# Altium PCB BluetoothGateway_V1.0.0.PcbDoc
Units mil, origin at the board's own origin, x right, y up, seen from the top; angles counter-clockwise.
Board outline 6000 x 4000 mil, 2 copper layers (Top Layer, Bottom Layer); 4 components, 1 nets, 104 pads, 0 vias.
Unrouted connection lines stored in the file: 11.
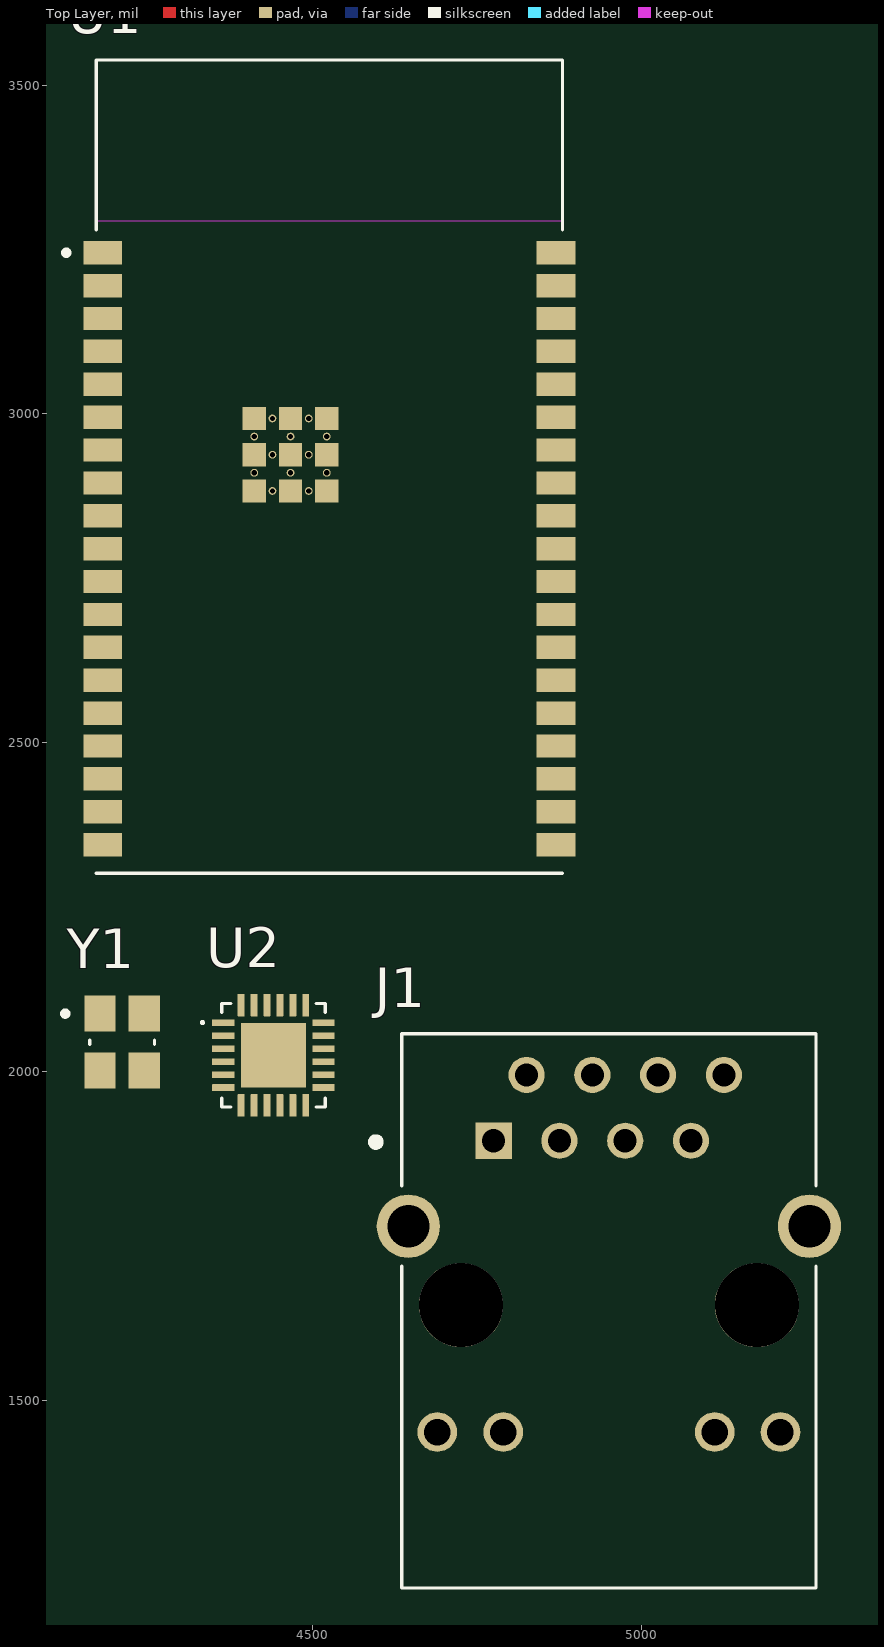
[diagram p0: Top Layer view]
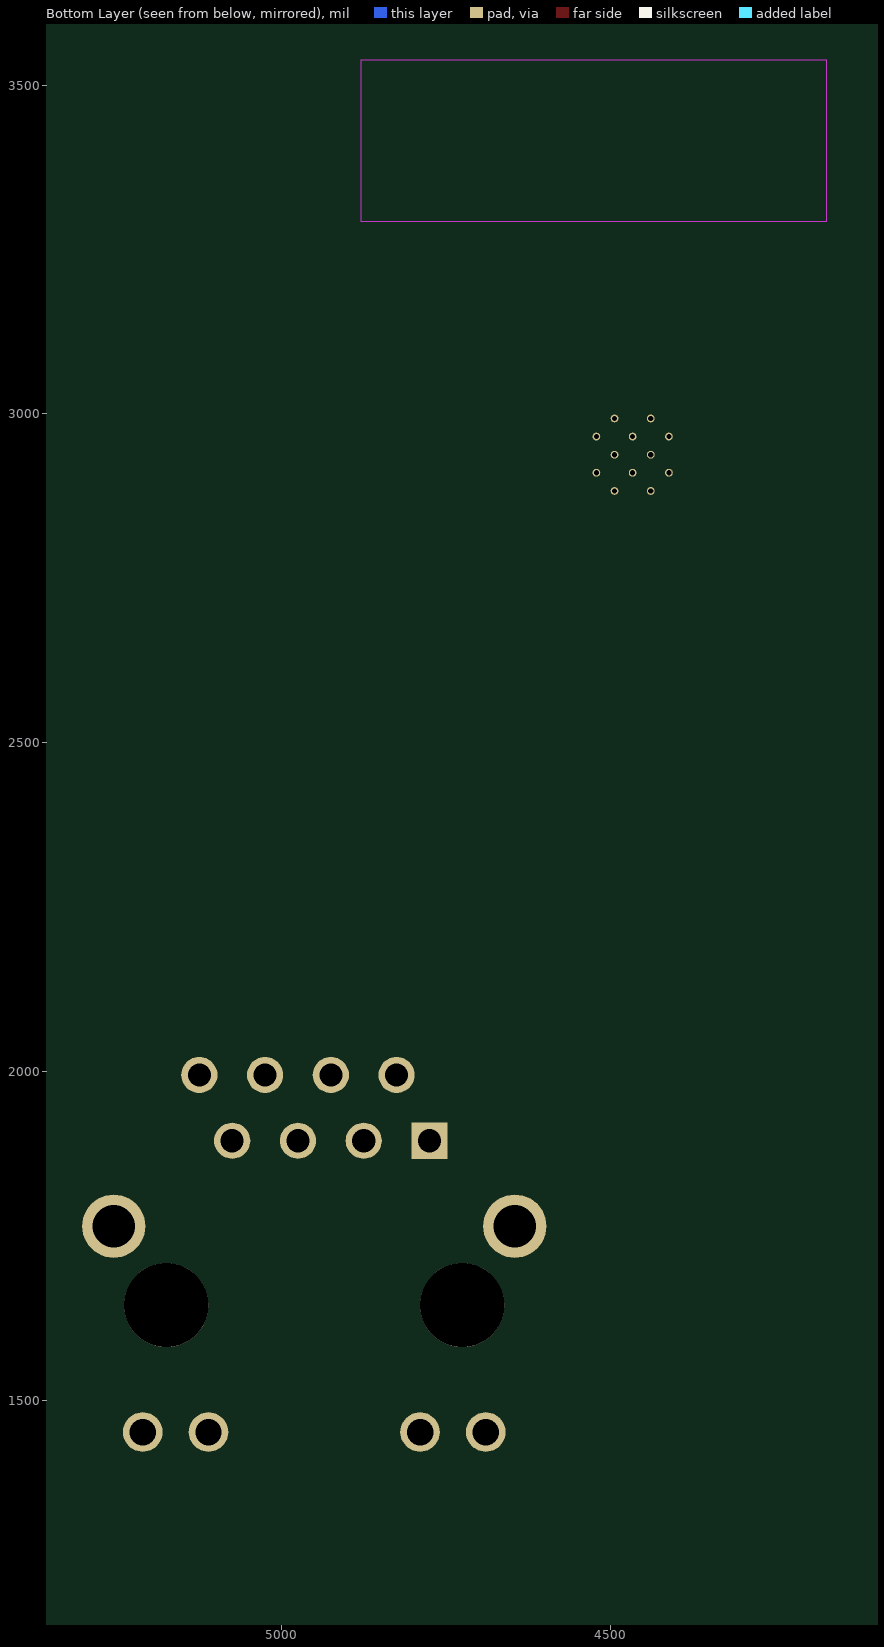
[diagram p1: Bottom Layer view, seen from below]

## Layer stack, top to bottom
Top Solder: solder mask 0.4, Solder Resist, Dk 3.5
Top Layer: signal copper 1.4
Dielectric 1: dielectric 12.6, FR-4, Dk 4.8
Bottom Layer: signal copper 1.4
Bottom Solder: solder mask 0.4, Solder Resist, Dk 3.5

## Board outline
1000,1000 7000,1000 7000,5000 1000,5000

## Design rules (kind name [scope] priority, off if disabled: settings)
Clearance [All] p1: gap=10 ignorepadtopadclearanceinfootprint=FALSE
PolygonConnect [All] p1: connectstyle=Relief reliefconductorwidth=10 reliefentries=4 polygonreliefangle="90 Angle" airgapwidth=10
RoutingVias [All] p1: holewidth=28 width=50 viastyle="Through Hole" minholewidth=28 minwidth=50 maxholewidth=28 maxwidth=50
SolderMaskExpansion [All] p1: expansion=4 istentingtop=FALSE
SupplyNets "Schematic Supply Nets" [InNet('GND')] p1: voltage=0.000
Width [All] p1: maxlimit=10 minlimit=10 preferedwidth=10
30 further rules are at their usual default settings.

## Classes and differential pairs
component class MCU: U1
component class Ethernet: J1 U2 Y1

## Components (designator, comment, footprint, x,y, rotation, side; value= is the part's Value field where it differs from the comment)
J1 "HR911105A" HANRUN_HR911105A 4950,1645 r180 top
U1 "ESP32-WROVER-IE-N4R8" XCVR_ESP32-WROVER-IE-N4R8 4525,2920 r0 top
U2 "LAN8720A-CP-TR" QFN-EP-24 4440,2025 r0 top
Y1 "Crystal_25MHz" Crystal_SMD_3225_4P 4210,2045 r0 top

## Footprints (in the part's own frame and the unit in brackets; to place one, negate y for a bottom-side part, rotate by r counter-clockwise, add the part's x,y. Pads: shape width x height; smd on the part's side, far side on the other; paste and mask are expansions set on the pad)
Crystal_SMD_3225_4P [mm]
  rect 1.2x1.4 smd: 1(-0.85,1.1) 2(-0.85,-1.1) 3(0.85,-1.1) 4(0.85,1.1)
  silkscreen extent -2.3,-0.08 1.25,1.2, body extent -1.25,-1.6 1.25,1.6, height 0.8
HANRUN_HR911105A [mm]
  rect 1.398x1.398 / inner round 1.398 / far side rect 1.398x1.398 hole 0.89: 1(4.45,-6.35)
  round 1.398 hole 0.89: 2(3.18,-8.89) 3(1.91,-6.35) 4(0.64,-8.89) 5(-0.63,-6.35) 6(-1.9,-8.89) 7(-3.17,-6.35) 8(-4.44,-8.89)
  round 1.53 hole 1.02: 9(6.625,4.9) 10(4.085,4.9) 11(-4.085,4.9) 12(-6.625,4.9)
  round 2.445 hole 1.63: 15(7.745,-3.05) 16(-7.745,-3.05)
  round 3.25 hole 3.25 unplated: ""(-5.715,0) ""(5.715,0)
  silkscreen extent -8,-10.48 9.15,10.92, body extent -8.02,-10.4 8.02,10.9, height 13.5
QFN-EP-24 [mm]
  rrect7% 0.86x0.26 smd: 1(-1.935,1.25) 2(-1.935,0.75) 3(-1.935,0.25) 4(-1.935,-0.25) 5(-1.935,-0.75) 6(-1.935,-1.25) 13(1.935,-1.25) 14(1.935,-0.75) 15(1.935,-0.25) 16(1.935,0.25) 17(1.935,0.75) 18(1.935,1.25)
  rrect7% 0.26x0.86 smd: 7(-1.25,-1.935) 8(-0.75,-1.935) 9(-0.25,-1.935) 10(0.25,-1.935) 11(0.75,-1.935) 12(1.25,-1.935) 19(1.25,1.935) 20(0.75,1.935) 21(0.25,1.935) 22(-0.25,1.935) 23(-0.75,1.935) 24(-1.25,1.935)
  rect 2.5x2.5 smd paste-2: 25(0,0)
  silkscreen extent -2.79,-2 2,2, body extent -2,-2 2,2, height 0.95
XCVR_ESP32-WROVER-IE-N4R8 [mm]
  rect 1.5x0.9 smd: 1(-8.75,8.26) 2(-8.75,6.99) 3(-8.75,5.72) 4(-8.75,4.45) 5(-8.75,3.18) 6(-8.75,1.91) 7(-8.75,0.64) 8(-8.75,-0.63) 9(-8.75,-1.9) 10(-8.75,-3.17) 11(-8.75,-4.44) 12(-8.75,-5.71) 13(-8.75,-6.98) 14(-8.75,-8.25) 15(-8.75,-9.52) 16(-8.75,-10.79) 17(-8.75,-12.06) 18(-8.75,-13.33) 19(-8.75,-14.6) 20(8.75,-14.6) 21(8.75,-13.33) 22(8.75,-12.06) 23(8.75,-10.79) 24(8.75,-9.52) 25(8.75,-8.25) 26(8.75,-6.98) 27(8.75,-5.71) 28(8.75,-4.44) 29(8.75,-3.17) 30(8.75,-1.9) 31(8.75,-0.63) 32(8.75,0.64) 33(8.75,1.91) 34(8.75,3.18) 35(8.75,4.45) 36(8.75,5.72) 37(8.75,6.99) 38(8.75,8.26)
  rect 0.9x0.9 smd: 39_1(-2.9,1.86) 39_2(-1.5,1.86) 39_3(-0.1,1.86) 39_4(-2.9,0.46) 39_5(-1.5,0.46) 39_6(-0.1,0.46) 39_7(-2.9,-0.94) 39_8(-1.5,-0.94) 39_9(-0.1,-0.94)
  round 0.3 hole 0.2 mask+0: 40(-2.2,1.86) 41(-0.8,1.86) 42(-2.9,1.16) 43(-1.5,1.16) 44(-0.1,1.16) 45(-2.2,0.46) 46(-0.8,0.46) 47(-2.9,-0.24) 48(-1.5,-0.24) 49(-0.1,-0.24) 50(-2.2,-0.94) 51(-0.8,-0.94)
  Keep-Out Layer region: 9,9.48 -9,9.48 -9,15.7 9,15.7
  silkscreen extent -10.26,-15.7 9,15.7, body extent -9,-15.7 9,15.7, height 3.45

## Part data
J1: "DIP RJ45 Connector;", Supply Part Number="HR911105A Cổng RJ45 Cái Có LED Hanrun", datasheet=https://core-electronics.com.au/attachments/localcontent/cc11be56d66bb63d5f1eeb85492439c0_335950a6d06.pdf, Supply Name=Thegioiic, Supply URL=https://www.thegioiic.com/hr911105a-cong-rj45-cai-co-led-hanrun
U1: "Bluetooth, WiFi 802.11b/g/n, Bluetooth v4.2 +EDR Transceiver Module 2.4GHz ~ 2.5GHz PCB Trace Surface Mount", Supply Part Number="ESP32-WROVER-IE-N4R8 Module WiFi Bluetooth 4MB Flash, 8MB PSRAM, 2.4GHz", datasheet=https://www.espressif.com/sites/default/files/documentation/esp32-wrover-e_esp32-wrover-ie_datasheet_en.pdf, Supply Name=Thegioiic, Supply URL=https://www.thegioiic.com/esp32-wrover-ie-n4r8-module-wifi-bluetooth-4mb-flash-8mb-psram-2-4ghz
U2: "PHY 1-CH 10Mbps/100Mbps 2.5V/3.3V 24-PinQFN EP Tray", Supply Part Number="LAN8720A IC Truyền Nhận Ethernet 24-QFN", datasheet=https://ww1.microchip.com/downloads/en/devicedoc/00002165b.pdf, Supply Name=Thegioiic, Supply URL=https://www.thegioiic.com/lan8720a-ic-truyen-nhan-ethernet-24-qfn
Y1: "25 MHz Crystal 4-SMD", Supply Part Number="Thạch Anh 25MHz 3225 4 Chân SMD", Supply Name=Thegioiic, Supply URL=https://www.thegioiic.com/thach-anh-25mhz-3225-4-chan-smd

## Nets (pads, with @x,y where several pads share a name; then routed paths per layer and width w, separated by ;. In a path a pad name is that pad's centre, name@x,y a point inside that pad or via, vN(x,y) a via of type N, cw(c..) or ccw(c..) an arc to the next point about the centre after c; other vN are vias at no path point)
GND: U1.1 U1.15 U1.38 U1.39_1 U1.39_2 U1.39_3 U1.39_4 U1.39_5 U1.39_6 U1.39_7 U1.39_8 U1.39_9
pads on no net: J1. J1.1 J1.2 J1.3 J1.4 J1.5 J1.6 J1.7 J1.8 J1.9 J1.10 J1.11 J1.12 J1.15 J1.16 U1.2 U1.3 U1.4 U1.5 U1.6 U1.7 U1.8 U1.9 U1.10 U1.11 U1.12 U1.13 U1.14 U1.16 U1.17 U1.18 U1.19 U1.20 U1.21 U1.22 U1.23 U1.24 U1.25 U1.26 U1.27 U1.28 U1.29 U1.30 U1.31 U1.32 U1.33 U1.34 U1.35 U1.36 U1.37 U1.40 U1.41 U1.42 U1.43 U1.44 U1.45 U1.46 U1.47 U1.48 U1.49 U1.50 U1.51 U2.1 U2.2 U2.3 U2.4 U2.5 U2.6 U2.7 U2.8 U2.9 U2.10 U2.11 U2.12 U2.13 U2.14 U2.15 U2.16 U2.17 U2.18 U2.19 U2.20 U2.21 U2.22 U2.23 U2.24 U2.25 Y1.1 Y1.2 Y1.3 Y1.4